# EAGLE board BSPD REV 3(1)  (EAGLE 9.6.2)
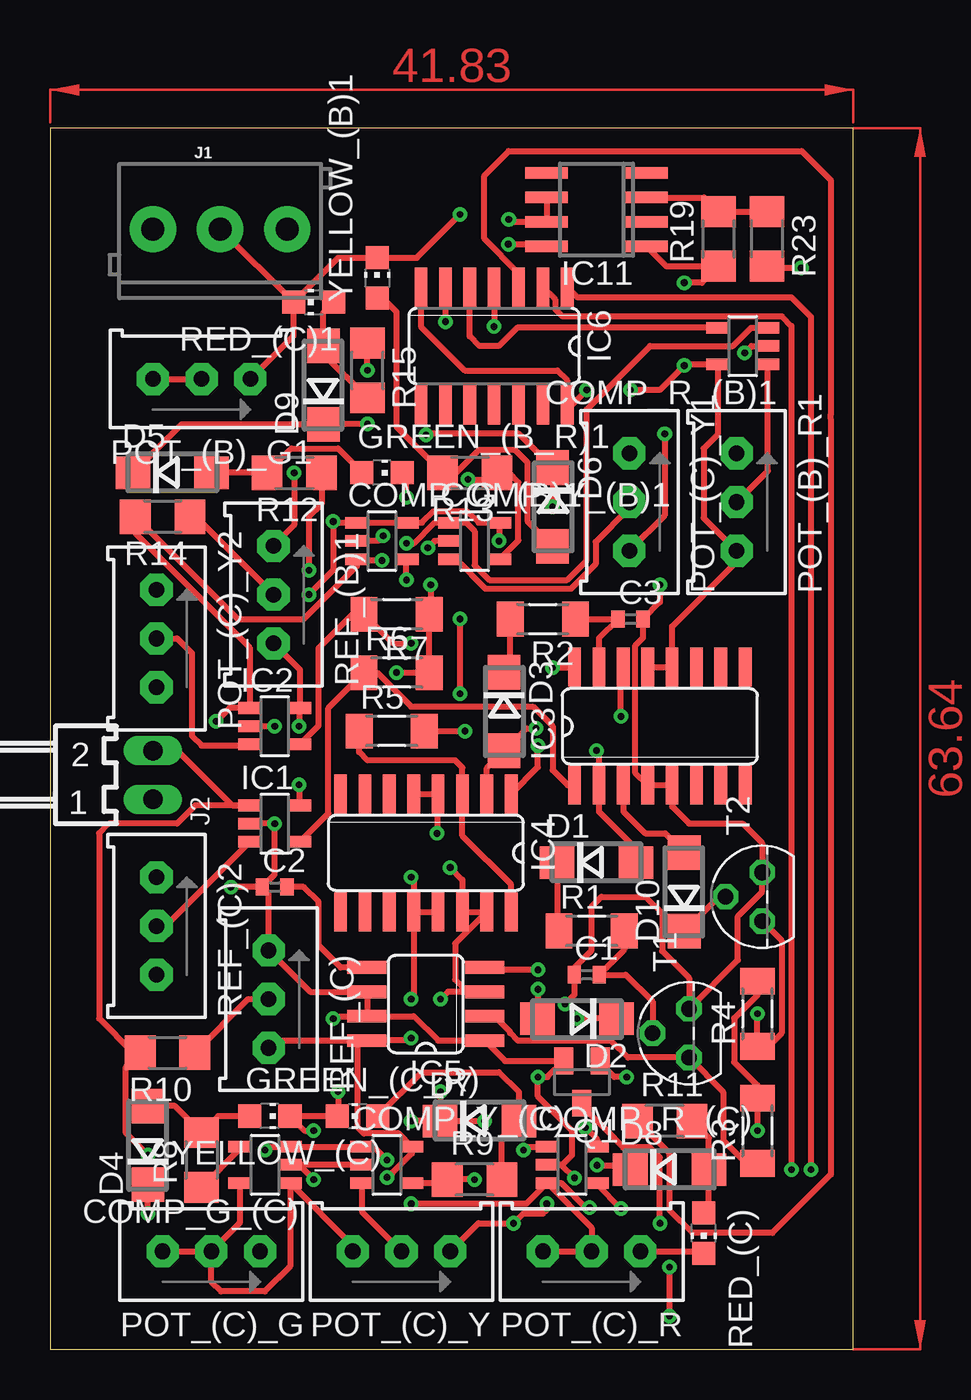
[diagram p0: board, top side]
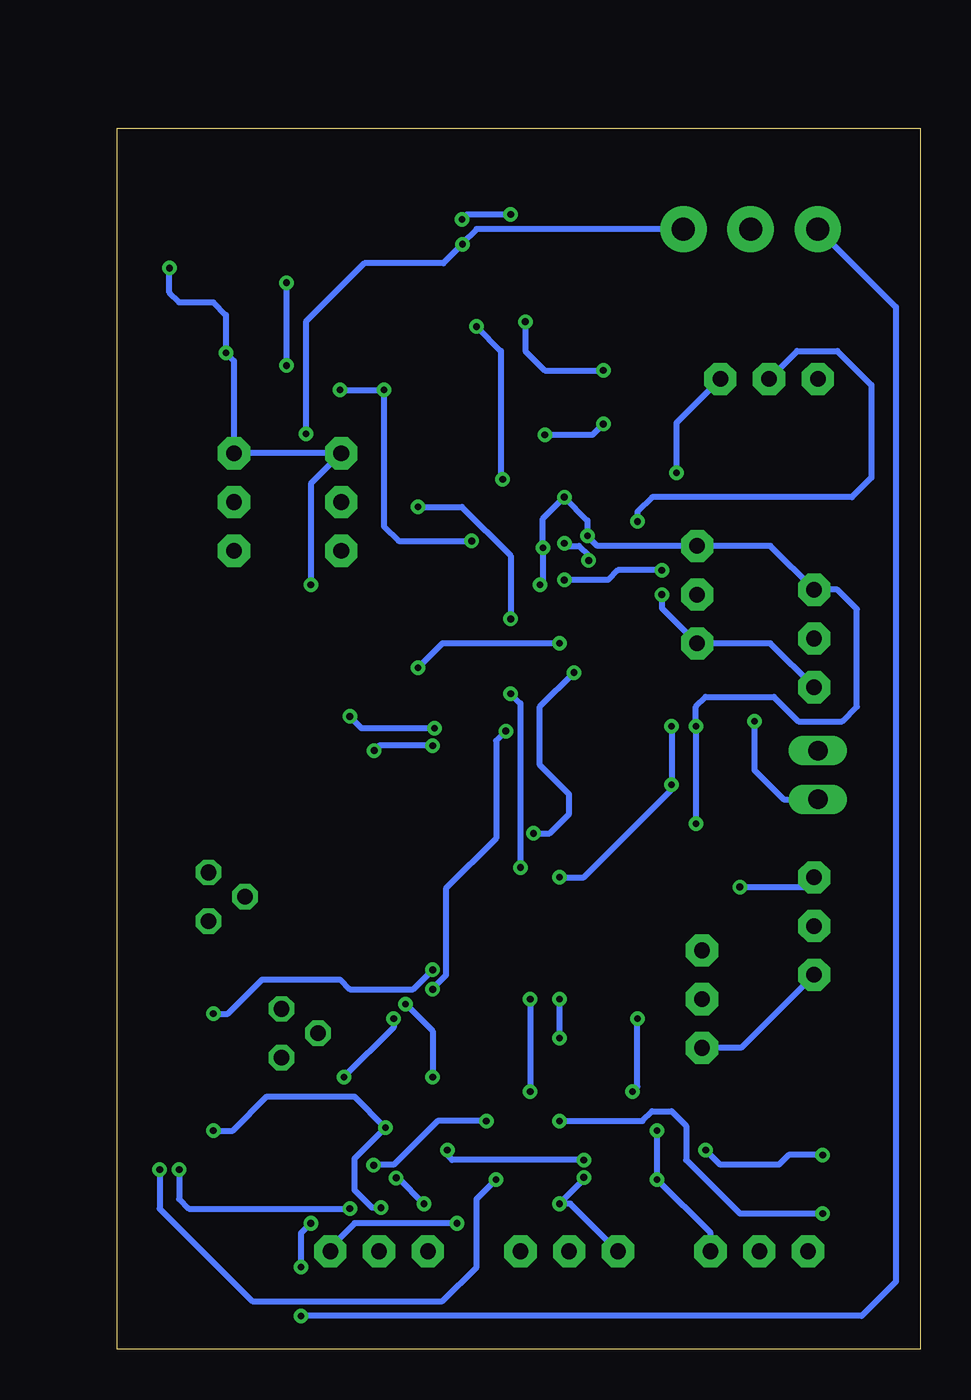
[diagram p1: board, bottom side, seen from below]

Size 41.83 x 63.64 mm. Coordinates in mm from the lower left corner, seen from the top.
Outline: 0,0 41.83,0 41.83,63.64 0,63.64 0,0
Copper layers (1*16): Top 0.035mm / dielectric 1.5mm / Bottom 0.035mm
Design rules "default": minimum track width 6mil, minimum drill 0.35mm, track to track 6mil, track to pad 6mil, pad to pad 6mil, via to via 6mil, smd to smd 6mil, copper to edge 40mil, drill to drill 6mil, minimum pad ring 10mil, minimum via ring 8mil, stop-mask expansion 4mil, vias tented up to drill 0mil, thermal gap 10mil

## Footprints (pad centres in the part's own frame; a part is rotated, then mirrored left to right if it is on the bottom)
C0402 = smd 0.7 x 0.9: 1 -0.65,0; 2 0.65,0
SOT23-5 = smd 0.6 x 1.2: 1 -0.95,-1.306; 2 0,-1.306; 3 0.95,-1.306; 4 0.95,1.306; 5 -0.95,1.306
DO214AC = smd 1.8 x 1.7: A 2.05,0; C -2.05,0
CHIP-LED0805 = smd 1.2 x 1.2: A 0,-1.05; C 0,1.05
SO16 = smd 0.66 x 2.032: 1 -4.445,-3.073; 2 -3.175,-3.073; 3 -1.905,-3.073; 4 -0.635,-3.073; 5 0.635,-3.073; 6 1.905,-3.073; 7 3.175,-3.073; 8 4.445,-3.073; 9 4.445,3.073; 10 3.175,3.073; 11 1.905,3.073; 12 0.635,3.073; 13 -0.635,3.073; 14 -1.905,3.073; 15 -3.175,3.073; 16 -4.445,3.073
SO08 = smd 0.66 x 2.032: 1 -1.905,-3.073; 2 -0.635,-3.073; 3 0.635,-3.073; 4 1.905,-3.073; 5 1.905,3.073; 6 0.635,3.073; 7 -0.635,3.073; 8 -1.905,3.073
SO14 = smd 0.66 x 2.032: 1 -3.81,-3.073; 2 -2.54,-3.073; 3 -1.27,-3.073; 4 0,-3.073; 5 1.27,-3.073; 6 2.54,-3.073; 7 3.81,-3.073; 8 3.81,3.073; 9 2.54,3.073; 10 1.27,3.073; 11 0,3.073; 12 -1.27,3.073; 13 -2.54,3.073; 14 -3.81,3.073
SOIC8 = smd 0.6 x 2.2: 1 -1.905,-2.6; 2 -0.635,-2.6; 3 0.635,-2.6; 4 1.905,-2.6; 5 1.905,2.6; 6 0.635,2.6; 7 -0.635,2.6; 8 -1.905,2.6
SCREWTERMINAL-3.5MM-3-NS = drill 1.2 pad 2.413: 1 0,0; 2 3.5,0; 3 7,0
7395-02 = drill 1.016 long: 1 1.27,0; 2 -1.27,0
3386W = drill 0.813 pad 1.676 octagon: 1 2.54,0.318; 2 0,0.318; 3 -2.54,0.318
SOT23 = smd 1 x 1.4: 1 -0.95,-1.1; 2 0.95,-1.1; 3 0,1.1
M1406 = smd 1.4 x 1.8: 1 -1.7,0; 2 1.7,0
R1206 = smd 1.6 x 1.803: 1 -1.422,0; 2 1.422,0
TO92 = drill 0.813 octagon: 1 1.27,0; 2 0,1.905; 3 -1.27,0

## Placement (x,y rotation side)
C1  [C0402]  27.94,19.51 0 top
C2  [C0402]  11.68,24.08 0 top
C3  [C0402]  30.23,38.05 0 top
COMP_G_(B)1  LM321MFX  [SOT23-5]  17.27,42.11 270 top
COMP_G_(C)  LM321MFX  [SOT23-5]  11.18,9.6 90 top
COMP_R_(B)1  LM321MFX  [SOT23-5]  36.07,52.27 90 top
COMP_R_(C)  LM321MFX  [SOT23-5]  27.18,9.6 270 top
COMP_Y_(B)1  LM321MFX  [SOT23-5]  22.1,42.11 270 top
COMP_Y_(C)  LM321MFX  [SOT23-5]  17.53,9.6 270 top
D1  [DO214AC]  28.45,25.35 0 top
D2  [DO214AC]  27.43,17.22 180 top
D3  [DO214AC]  23.62,33.22 270 top
D4  [DO214AC]  5.08,10.62 90 top
D5  [DO214AC]  6.35,45.67 0 top
D6  [DO214AC]  26.16,43.89 270 top
D7  [DO214AC]  22.35,11.89 0 top
D8  [DO214AC]  32.26,9.35 0 top
D9  [DO214AC]  14.22,50.24 90 top
D10  [DO214AC]  33.02,23.83 90 top
GREEN_(B_R)1  GREEN_(C)  [CHIP-LED0805]  17.27,45.67 270 top
GREEN_(C_R)  GREEN_(C)  [CHIP-LED0805]  11.43,12.14 270 top
IC1  LM321MF  [SOT23-5]  11.68,27.38 270 top
IC2  LM321MF  [SOT23-5]  11.68,32.46 270 top
IC3  74AC11008D  [SO16]  31.75,32.46 0 top
IC4  74AC11002D  [SO16]  19.56,25.86 180 top
IC5  LM555D  [SO08]  19.56,17.98 90 top
IC6  74AC86D  [SO14]  23.11,52.27 180 top
IC11  [SOIC8]  28.45,59.39 90 top
J1  [SCREWTERMINAL-3.5MM-3-NS]  5.33,58.37 0 top
J2  22-05-7028-02  [7395-02]  5.33,29.92 270 top
POT_(B)_G1  [3386W]  7.87,50.24 0 top
POT_(B)_R1  [3386W]  36.07,44.15 90 top
POT_(C)_G  [3386W]  8.38,4.78 0 top
POT_(C)_R  [3386W]  28.19,4.78 0 top
POT_(C)_Y  [3386W]  18.29,4.78 0 top
POT_(C)_Y1  [3386W]  30.48,44.15 90 top
POT_(C)_Y2  [3386W]  5.84,37.03 90 top
Q1  [SOT23]  27.69,13.92 180 top
R1  [M1406]  28.19,21.79 0 top
R2  [M1406]  25.65,38.05 180 top
R3  [M1406]  36.83,11.38 90 top
R4  [M1406]  36.83,17.48 90 top
R5  [M1406]  17.78,32.21 0 top
R6  [M1406]  18.03,35.26 0 top
R7  [M1406]  18.03,38.3 180 top
R8  [R1206]  7.87,9.86 90 top
R9  [R1206]  22.1,8.84 0 top
R10  [R1206]  6.1,15.44 180 top
R11  [R1206]  32,11.89 0 top
R12  [R1206]  12.7,45.67 180 top
R13  [R1206]  21.84,45.67 180 top
R14  [R1206]  5.84,43.38 180 top
R15  [R1206]  16.51,51 270 top
R19  [R1206]  34.8,57.86 90 top
R23  [R1206]  37.34,57.86 270 top
RED_(C)  [CHIP-LED0805]  34.04,6.05 180 top
RED_(C)1  [CHIP-LED0805]  13.72,54.56 90 top
REF_(B)1  [3386W]  11.94,39.32 90 top
REF_(C)  [3386W]  11.68,18.24 90 top
REF_(C)2  [3386W]  5.84,22.05 90 top
T1  BC547  [TO92]  33.27,16.46 90 top
T2  BC547  [TO92]  37.08,23.57 90 top
YELLOW_(B)1  [CHIP-LED0805]  17.02,55.83 0 top
YELLOW_(C)  [CHIP-LED0805]  16,12.14 90 top

## Library data of the parts
C1-C3 IC5 Q1 R1-R7 = adafruit
COMP_G_(B)1 COMP_G_(C) COMP_R_(B)1 COMP_R_(C) COMP_Y_(B)1 COMP_Y_(C) IC1 IC2 = linear
D1-D10 = diode
GREEN_(B_R)1 GREEN_(C_R) RED_(C) RED_(C)1 YELLOW_(B)1 YELLOW_(C) = led
IC3 IC4 = 74ac-logic
IC6 = 74xx-eu
IC11 = linear-technology; MPN: LT1129CS8-5#PBF; OC_FARNELL: 1273576; OC_NEWARK: 57M2078
J1 = SparkFun-Connectors
J2 = con-molex; MF: MOLEX; OC_FARNELL: 9731601; OC_NEWARK: unknown
POT_(B)_G1 POT_(B)_R1 POT_(C)_G POT_(C)_R POT_(C)_Y POT_(C)_Y1 POT_(C)_Y2 REF_(B)1 REF_(C) REF_(C)2 = bourns
R8-R15 R19 R23 = rcl; SPICEPREFIX: R
T1 T2 = transistor

## Nets
12V: IC11.8 J1.3 POT_(C)_Y1.3
AIR: J1.1 Q1.3
GND: C1.1 C2.1 C3.2 COMP_G_(B)1.2 COMP_G_(C).2 COMP_R_(B)1.2 COMP_R_(C).2 COMP_Y_(B)1.2 COMP_Y_(C).2 GREEN_(B_R)1.C GREEN_(C_R).C IC1.2 IC2.2 IC3.4 IC3.5 IC4.4 IC4.5 IC5.1 IC5.6 IC5.7 IC11.6 IC11.7 J1.2 POT_(B)_G1.1 POT_(B)_R1.1 POT_(C)_G.1 POT_(C)_R.1 POT_(C)_Y1.1 POT_(C)_Y2.1 POT_(C)_Y.1 Q1.2 R6.2 R7.1 R23.2 RED_(C)1.C RED_(C).C REF_(B)1.1 REF_(C)2.1 REF_(C).1 T1.1 T2.1 YELLOW_(B)1.C YELLOW_(C).C
N$2: COMP_R_(B)1.1 POT_(B)_R1.2
N$3: IC1.3 REF_(C)2.2
N$4: IC2.3 POT_(C)_Y2.2
N$5: IC1.4 IC3.1 R6.1
N$6: IC2.4 IC3.16 R7.2
N$7: D1.A IC3.2 IC4.1
N$8: IC4.3 IC4.16 R5.1
N$9: D1.C R1.1
N$10: D3.A IC3.14 IC4.2
N$11: D3.C R2.2
N$12: C3.1 IC3.15 R2.1
N$13: C1.2 R1.2 T1.2
N$14: IC5.2 R3.1 T1.3
N$15: IC5.4 R4.1 T2.3
N$16: COMP_G_(C).4 R8.1
N$17: D2.A R5.2
N$18: D10.A IC3.3
N$19: C2.2 IC5.5
N$21: D2.C Q1.1
N$22: COMP_Y_(C).4 IC6.1 R9.1
N$23: COMP_R_(C).4 IC6.2
N$24: D4.A GREEN_(C_R).A R8.2
N$25: D8.A R11.2 RED_(C).A
N$26: R10.1 REF_(C).2
N$27: COMP_Y_(C).3 POT_(C)_Y.2
N$28: IC6.3 R11.1
N$29: COMP_G_(B)1.4 R12.1
N$30: COMP_Y_(B)1.4 IC6.4 R13.1
N$31: COMP_R_(B)1.4 IC6.5
N$32: D5.A GREEN_(B_R)1.A R12.2
N$33: D9.A R15.2 RED_(C)1.A
N$34: D7.A R9.2 YELLOW_(C).A
N$35: R14.1 REF_(B)1.2
N$36: COMP_Y_(B)1.3 POT_(C)_Y1.2
N$37: IC6.6 R15.1
N$38: D6.A R13.2 YELLOW_(B)1.A
N$39: IC11.3 R19.2 R23.1
N$40: D10.C T2.2
NOT_I/P: D4.C D5.C D6.C D7.C D8.C D9.C IC4.14 IC4.15 IC5.3
VCC: COMP_G_(B)1.1 COMP_G_(B)1.5 COMP_G_(C).1 COMP_G_(C).5 COMP_R_(B)1.5 COMP_R_(C).3 COMP_R_(C).5 COMP_Y_(B)1.5 COMP_Y_(C).5 IC1.5 IC2.5 IC3.12 IC3.13 IC4.12 IC4.13 IC5.8 IC6.7 IC6.14 IC11.1 POT_(B)_G1.2 POT_(B)_G1.3 POT_(B)_R1.3 POT_(C)_G.2 POT_(C)_G.3 POT_(C)_R.2 POT_(C)_R.3 POT_(C)_Y2.3 POT_(C)_Y.3 R3.2 R4.2 R19.1 REF_(B)1.3 REF_(C)2.3 REF_(C).3
WFDC_I/P_(B): COMP_G_(B)1.3 COMP_R_(B)1.3 COMP_Y_(B)1.1 IC2.1 J2.1 R14.2
WFDC_I/P_(C): COMP_G_(C).3 COMP_R_(C).1 COMP_Y_(C).1 IC1.1 J2.2 R10.2

## Tracks (layer width: path | path; a pad name or v marks a point on that pad's centre or on a via)
12V  (via drill 0.35)
  Top 0.305: v23.85,57.58 25.75,57.58 IC11.8 | v32,47.7 32,43.45 POT_(C)_Y1.3
  Bottom 0.305: J1.3 23.11,58.37 23.88,57.61 v23.85,57.58 24.84,56.59 28.96,56.59 32,53.54 v32,47.7
AIR  (via drill 0.35)
  Top 0.305: v32.26,1.73 v32.26,4.27 | v31.75,6.55 31.75,9.99 31.23,10.5 29.83,10.5 29.39,10.95 29.39,10.98 27.69,12.68 Q1.3
  Bottom 0.305: J1.1 1.27,54.31 1.27,3.51 3.05,1.73 v32.26,1.73 | v32.26,4.27 32.26,6.05 v31.75,6.55
GND  (via drill 0.35)
  Top 0.305: 16.51,17.35 IC5.7 14.86,17.35 v14.73,17.22 | 16.51,17.35 18.92,17.35 20.19,16.08 IC5.1 23.69,15.02 Q1.2 25.89,14.17 v25.4,14.17 25.4,13.16 27.18,11.38 27.18,10.11 26.67,9.6 COMP_R_(C).2 26.62,9.6 v27.3,8.92 | 16.51,17.35 16.51,18.59 IC5.6 13.53,18.62 REF_(C).1 11.37,23.75 C2.1 | POT_(B)_G1.1 12.67,52.81 RED_(C)1.C | RED_(C)1.C 14.99,56.88 YELLOW_(B)1.C 19.08,56.88 v21.34,59.13 | RED_(C)1.C 8.86,58.37 J1.2 | IC11.6 IC11.7 24,58.75 v23.88,58.88 | COMP_Y_(C).2 COMP_G_(C).2 12.95,9.6 v13.72,8.84 | POT_(C)_R.1 33.94,5.09 RED_(C).C | v39.12,56.34 37.44,56.34 R23.2 | v12.7,45.67 12.7,42.94 REF_(B)1.1 | v19.66,41.76 20.02,42.11 COMP_Y_(B)1.2 | v19.81,39.83 19.81,38.38 R7.1 R6.2 v18.03,35.26 | v18.54,44.4 18.54,45.45 GREEN_(B_R)1.C | v31.75,39.83 31.75,38.92 C3.2 30.88,37.07 30.48,36.68 30.48,30.02 IC3.4 IC3.5 32.38,28.27 33.27,27.38 36.07,27.38 37.08,26.37 T2.1 37.08,23.83 35.81,22.56 35.81,20.27 T1.1 33.27,19.34 31.87,20.75 31.87,22.69 30.99,23.57 28.7,23.57 28.19,23.06 28.19,20.78 27.29,19.87 C1.1 27.29,18.46 v26.81,17.98 | IC2.2 v11.68,32.46 | IC1.2 v11.68,27.38 11.68,24.73 C2.1 | C2.1 v9.4,24.08 | v14.99,13.41 14.99,12.18 YELLOW_(C).C GREEN_(C_R).C 13.24,11.38 v13.72,11.38 | POT_(C)_Y.1 22.29,6.55 v24.13,6.55 24.64,7.06 25.65,7.06 25.86,7.26 v25.86,7.57 | IC4.5 IC4.4 20.14,28.88 v20.14,26.87 | v36.17,51.92 36.53,52.27 COMP_R_(B)1.2 | v17.34,42.38 17.07,42.11 COMP_G_(B)1.2
  Bottom 0.305: v21.34,59.13 23.62,59.13 v23.88,58.88 | v39.12,56.34 39.12,55.07 38.61,54.56 36.83,54.56 36.17,53.9 v36.17,51.92 35.75,51.5 POT_(B)_R1.1 POT_(C)_Y1.1 31.75,45.1 v31.75,39.83 | POT_(B)_G1.1 12.7,48.27 v12.7,45.67 | v19.81,39.83 19.66,39.98 v19.66,41.76 19.66,43.28 v18.54,44.4 17.34,43.19 v17.34,42.38 16.81,41.86 REF_(B)1.1 7.81,41.86 POT_(C)_Y2.1 4.32,39.57 3.3,38.56 3.3,33.48 4.06,32.72 6.35,32.72 7.62,33.99 11.18,33.99 11.68,33.48 v11.68,32.46 v11.68,27.38 | v9.4,24.08 6.03,24.08 REF_(C)2.1 | v26.81,17.98 25.4,16.57 v25.4,14.17 | v24.13,6.55 29.46,6.55 30.73,5.28 POT_(C)_R.1 | v13.72,11.38 v13.72,8.84 10.92,6.05 POT_(C)_G.1 | v20.14,26.87 19.3,26.87 18.29,27.89 18.29,28.91 19.81,30.43 19.81,33.48 v18.03,35.26 | v14.99,13.41 14.73,13.67 v14.73,17.22 | v25.86,7.57 27.21,8.92 v27.3,8.92
N$2
  Top 0.305: POT_(B)_R1.2 37.37,45.77 COMP_R_(B)1.1
N$3
  Top 0.305: IC1.3 5.99,22.05 REF_(C)2.2
N$4
  Top 0.305: POT_(C)_Y2.2 6.6,37.03 7.37,36.27 7.37,31.95 7.87,31.45 10.31,31.45 IC2.3
N$5
  Top 0.305: IC1.4 14.48,27.92 14.48,33.4 R6.1 17.02,35.26 18.8,33.48 25.15,33.48 26.16,32.46 26.16,30.18 26.95,29.39 IC3.1
N$6  (via drill 0.35)
  Top 0.305: IC2.4 13.97,32.49 13.97,36.53 15.75,38.3 R7.2 17.86,36.78 v18.8,36.78 | v26.16,35.51 27.28,35.51 IC3.16
  Bottom 0.305: v18.8,36.78 24.89,36.78 v26.16,35.51
N$7  (via drill 0.35)
  Top 0.305: IC4.1 25.4,30.33 v25.4,31.45 | v28.45,31.19 28.57,31.06 IC3.2 28.57,28.02 30.5,26.09 D1.A
  Bottom 0.305: v25.4,31.45 28.19,31.45 v28.45,31.19
N$8
  Top 0.305: IC4.16 24,24.21 21.46,26.75 IC4.3 21.46,30.3 21.08,30.68 16.51,30.68 16.08,31.11 R5.1
N$9
  Top 0.305: D1.C 26.4,21.89 R1.1
N$10  (via drill 0.35)
  Top 0.305: IC4.2 22.73,30.28 D3.A 24.8,32.35 v25.3,32.35 | v29.72,32.97 29.72,35.41 IC3.14
  Bottom 0.305: v25.3,32.35 29.1,32.35 v29.72,32.97
N$11
  Top 0.305: D3.C 23.95,35.61 R2.2
N$12
  Top 0.305: R2.1 C3.1 28.57,37.05 IC3.15
N$13
  Top 0.305: R1.2 29.89,20.81 C1.2 29.97,19.51 31.37,18.11 T1.2
N$14
  Top 0.305: R3.1 36.24,9.68 35.05,10.87 35.05,13.41 T1.3 30.1,15.19 29.22,16.07 24.36,16.07 23.95,16.47 23.95,16.53 23.14,17.35 IC5.2
N$15  (via drill 0.35)
  Top 0.305: T2.3 38.1,21.29 38.1,16.46 37.42,15.78 R4.1 v36.83,17.48 | v25.4,19.76 22.76,19.76 IC5.4
  Bottom 0.305: v36.83,17.48 36.07,17.48 34.29,19.25 30.23,19.25 29.72,18.75 26.42,18.75 v25.4,19.76
N$16
  Top 0.305: R8.1 9.87,10.43 COMP_G_(C).4
N$17  (via drill 0.35)
  Top 0.305: R5.2 v21.59,32.21 | v25.4,18.75 25.4,17.24 D2.A
  Bottom 0.305: v21.59,32.21 22.1,31.7 22.1,26.62 24.72,24 24.72,19.48 25.4,18.8 v25.4,18.75
N$18
  Top 0.305: IC3.3 29.84,28.02 30.99,26.87 32.02,26.87 D10.A
N$19
  Top 0.305: IC5.5 15.11,19.89 13.97,21.03 13.97,23.32 13.21,24.08 C2.2
N$21  (via drill 0.35)
  Top 0.305: D2.C v27.43,17.22 | Q1.1 28.61,15.02 28.61,14.95 29.39,14.17 v30.02,14.17
  Bottom 0.305: v27.43,17.22 27.43,16.76 v30.02,14.17
N$22  (via drill 0.35)
  Top 0.305: COMP_Y_(C).4 20.49,8.65 R9.1 v22.1,8.84 | IC6.1 27.46,54.81 38.61,54.81 39.62,53.8 v39.62,9.35
  Bottom 0.305: v39.62,9.35 39.62,7.32 34.8,2.49 24.89,2.49 23.11,4.27 23.11,7.82 v22.1,8.84
N$23  (via drill 0.35)
  Top 0.305: IC6.2 26.29,54.71 26.29,54.2 26.66,53.83 38.1,53.83 38.61,53.32 v38.61,9.35 | v29.72,7.32 28.48,8.55 COMP_R_(C).4
  Bottom 0.305: v38.61,9.35 38.61,7.82 38.1,7.32 v29.72,7.32
N$24
  Top 0.305: GREEN_(C_R).A 8.74,12.14 R8.2 6.48,12.67 D4.A
N$25
  Top 0.305: RED_(C).A 34.31,7.37 D8.A 34.31,11.01 R11.2
N$26
  Top 0.305: R10.1 10.31,18.24 REF_(C).2
N$27
  Top 0.305: COMP_Y_(C).3 16.22,7.16 POT_(C)_Y.2
N$28
  Top 0.305: IC6.3 24.38,56.08 22.61,57.86 22.61,61.16 23.88,62.43 39.14,62.43 40.67,60.91 40.67,48.72 40.67,48.46 40.67,9.09 37.62,6.05 33.45,6.05 32.26,7.24 32.26,10.21 R11.1
N$29  (via drill 0.35)
  Top 0.305: R12.1 14.12,44.04 13.46,43.38 v13.46,40.59 | v18.54,40.08 18.54,41.13 COMP_G_(B)1.4
  Bottom 0.305: v13.46,40.59 15.75,40.59 16.26,40.08 v18.54,40.08
N$30  (via drill 0.35)
  Top 0.305: COMP_Y_(B)1.4 24.38,42.14 24.38,45.16 23.88,45.67 R13.1 22.92,45.32 v21.75,45.32 | IC6.4 v23.11,53.29
  Bottom 0.305: v23.11,53.29 21.84,52.02 21.84,45.41 v21.75,45.32
N$31
  Top 0.305: COMP_R_(B)1.4 24.32,53.22 23.37,52.27 22.35,52.27 21.84,52.78 IC6.5
N$32
  Top 0.305: D5.A R12.2 12.55,46.94 14.99,46.94 16.22,45.7 GREEN_(B_R)1.A
N$33
  Top 0.305: R15.2 14.22,51.87 D9.A 14.22,54.02 RED_(C)1.A
N$34
  Top 0.305: R9.2 23.52,11.01 D7.A 24.4,13.39 23.37,14.43 19.34,14.43 YELLOW_(C).A
N$35
  Top 0.305: REF_(B)1.2 7.56,43.38 R14.1
N$36
  Top 0.305: POT_(C)_Y1.2 30.16,43.83 28.4,42.06 28.4,40.91 27.11,39.62 22.67,39.62 21.13,41.16 COMP_Y_(B)1.3
N$37  (via drill 0.35)
  Top 0.305: IC6.6 v20.57,53.54 | v16.51,51 R15.1
  Bottom 0.305: v20.57,53.54 20.57,52.02 19.56,51 v16.51,51
N$38
  Top 0.305: D6.A 24.84,43.16 24.84,46.23 24.19,46.88 22.34,46.88 21.13,45.67 R13.2 18.03,48.06 18.03,54.05 17.31,54.78 YELLOW_(B)1.A
N$39
  Top 0.305: R23.1 R19.2 34.06,60.02 IC11.3
N$40
  Top 0.305: D10.C 34.82,23.57 T2.2
NOT_I/P  (via drill 0.35)
  Top 0.305: D5.C 6.82,48.19 D9.C 14.24,48.21 v16.51,48.21 | v19.56,47.65 19.56,47.7 24.4,47.7 D6.C v26.16,43.89 | v20.83,25.1 21.46,24.46 IC4.14 IC4.15 21.08,21.13 21.08,19.25 21.72,18.62 IC5.3 20.7,18.62 v20.32,18.24 | v21.34,38.05 v21.34,34.16 | v20.32,13.41 20.32,11.91 D7.C | D7.C v22.61,11.89 | v28.47,9.58 29.98,9.58 D8.C | D7.C v18.8,11.89 | v5.08,7.06 D4.C
  Bottom 0.305: v19.56,47.65 17.07,47.65 v16.51,48.21 | v26.16,43.89 23.88,43.89 21.34,41.35 v21.34,38.05 | v21.34,34.16 20.83,33.65 v20.83,25.1 | v20.32,18.24 v20.32,13.41 | v22.61,11.89 25.15,11.89 27.43,9.6 28.45,9.6 v28.47,9.58 | v18.8,11.89 14.48,11.89 13.97,12.4 12.95,12.4 12.19,11.63 12.19,9.86 9.4,7.06 v5.08,7.06
VCC  (via drill 0.35)
  Top 0.305: IC6.7 19.3,53.29 21.59,51 26.42,51 26.92,50.5 IC6.14 27.15,49.2 v27.94,49.99 | POT_(C)_G.2 8.38,3.51 8.89,3 11.18,3 12.48,4.3 COMP_G_(C).1 15.75,5.39 POT_(C)_Y.3 | COMP_R_(C).3 28.19,6.33 POT_(C)_R.2 POT_(C)_R.3 | POT_(C)_G.3 POT_(C)_G.2 | POT_(B)_G1.3 POT_(B)_G1.2 | v33.02,55.58 33.93,55.58 R19.1 32.09,56.44 IC11.1 | 35.65,41.7 34.04,43.32 34.04,46.94 34.76,47.67 COMP_R_(B)1.5 33.09,51.32 v33.02,51.26 31.75,49.99 v30.23,49.99 | 35.65,41.7 POT_(B)_R1.3 | v23.37,42.11 23.4,42.15 COMP_Y_(B)1.5 22.3,43.06 21.7,43.67 19.96,43.67 19.35,43.06 COMP_G_(B)1.5 COMP_G_(B)1.1 14.8,43.06 v14.73,43.13 14.73,40.59 v13.46,39.32 | IC3.13 IC3.12 32.38,37.67 35.65,40.94 35.65,41.7 | REF_(B)1.3 12.99,35.41 IC2.5 12.95,33.38 v12.95,32.46 | IC1.5 12.95,28.37 v12.95,29.41 | IC4.12 IC4.13 | v18.8,24.59 18.92,24.46 IC4.12 | REF_(C).3 11.75,16.08 16,16.08 | 16,16.08 IC5.8 18.67,16.08 v18.8,16.21 | R4.2 36.83,18.44 35.62,17.24 35.62,14.95 36.83,13.74 R3.2 v36.83,11.38 | IC4.12 18.92,18.36 v18.8,18.24 | 16,16.08 16,11.56 16.33,11.24 18.15,11.24 COMP_Y_(C).5 18.83,10.2 17.81,9.17 17.75,9.17 v17.53,8.95 | COMP_R_(C).3 24.79,7.57 v18.8,7.57 | COMP_G_(C).5 9.87,6.58 POT_(C)_G.2 | v27.86,11.54 28.48,10.92 COMP_R_(C).5 | COMP_R_(C).3 26.6,8.65 27.94,7.32 28.04,7.32 v28.09,7.37
  Bottom 0.305: POT_(B)_G1.2 6.41,52.02 4.32,52.02 2.54,50.24 2.54,45.42 3.56,44.4 13.97,44.4 14.73,43.64 v14.73,43.13 | v33.02,55.58 v33.02,51.26 | v30.23,49.99 v27.94,49.99 27.94,42.88 27.18,42.11 v23.37,42.11 | v13.46,39.32 13.46,38.62 REF_(B)1.3 7.81,36.78 POT_(C)_Y2.3 | v18.8,24.59 17.53,24.59 12.95,29.16 v12.95,29.41 v12.95,32.46 | REF_(C)2.3 9.33,15.7 REF_(C).3 | v18.8,18.24 v18.8,16.21 | v36.83,11.38 35.81,11.38 34.04,13.16 29.48,13.16 v27.86,11.54 29.46,9.94 29.46,8.28 28.55,7.37 v28.09,7.37 | v17.53,8.95 17.53,8.84 v18.8,7.57 18.22,7.57 POT_(C)_Y.3
WFDC_I/P_(B)  (via drill 0.35)
  Top 0.305: v8.64,32.72 9.33,33.41 IC2.1 10.38,36.56 4.42,42.52 R14.2 9.75,38.05 13.21,38.05 15.97,40.81 COMP_G_(B)1.3 16.03,41.1 v17.27,41.1 | COMP_R_(B)1.3 36.51,53.22 35.56,52.27 31.24,52.27 27.94,48.97 27.94,41.1 26.92,40.08 22.86,40.08 22.1,40.84 22.1,42.62 21.66,43.06 COMP_Y_(B)1.1 20,43.06 18.93,41.99 v18.54,41.99
  Bottom 0.305: v8.64,32.72 8.64,30.18 7.11,28.65 J2.1 | v18.54,41.99 18.54,41.86 17.78,41.86 17.27,41.35 v17.27,41.1
WFDC_I/P_(C)  (via drill 0.35)
  Top 0.305: J2.2 6.6,31.19 9.46,28.33 IC1.1 7.55,28.33 6.6,27.38 3.05,27.38 2.54,26.87 2.54,17.22 4.32,15.44 R10.2 3.92,14.69 3.92,11.26 v5.08,10.11 | v11.18,10.36 11.36,10.55 COMP_G_(C).3 COMP_Y_(C).1 16.83,10.55 v17.53,9.86 | v24.64,10.36 24.83,10.55 COMP_R_(C).1
  Bottom 0.305: v5.08,10.11 6.86,10.11 7.37,9.6 10.41,9.6 v11.18,10.36 | v17.53,9.86 24.38,9.86 24.64,10.11 v24.64,10.36
(copper drawn outside any net)
  shapes: Top area x2